# Altium PCB clock_control.PcbDoc
Units mm, origin at the board's own origin, x right, y up, seen from the top; angles counter-clockwise.
Board outline 100 x 61.5 mm, 2 copper layers (Top Layer, Bottom Layer); 48 components, 75 nets, 292 pads, 42 vias.
Unrouted connection lines stored in the file: 25.
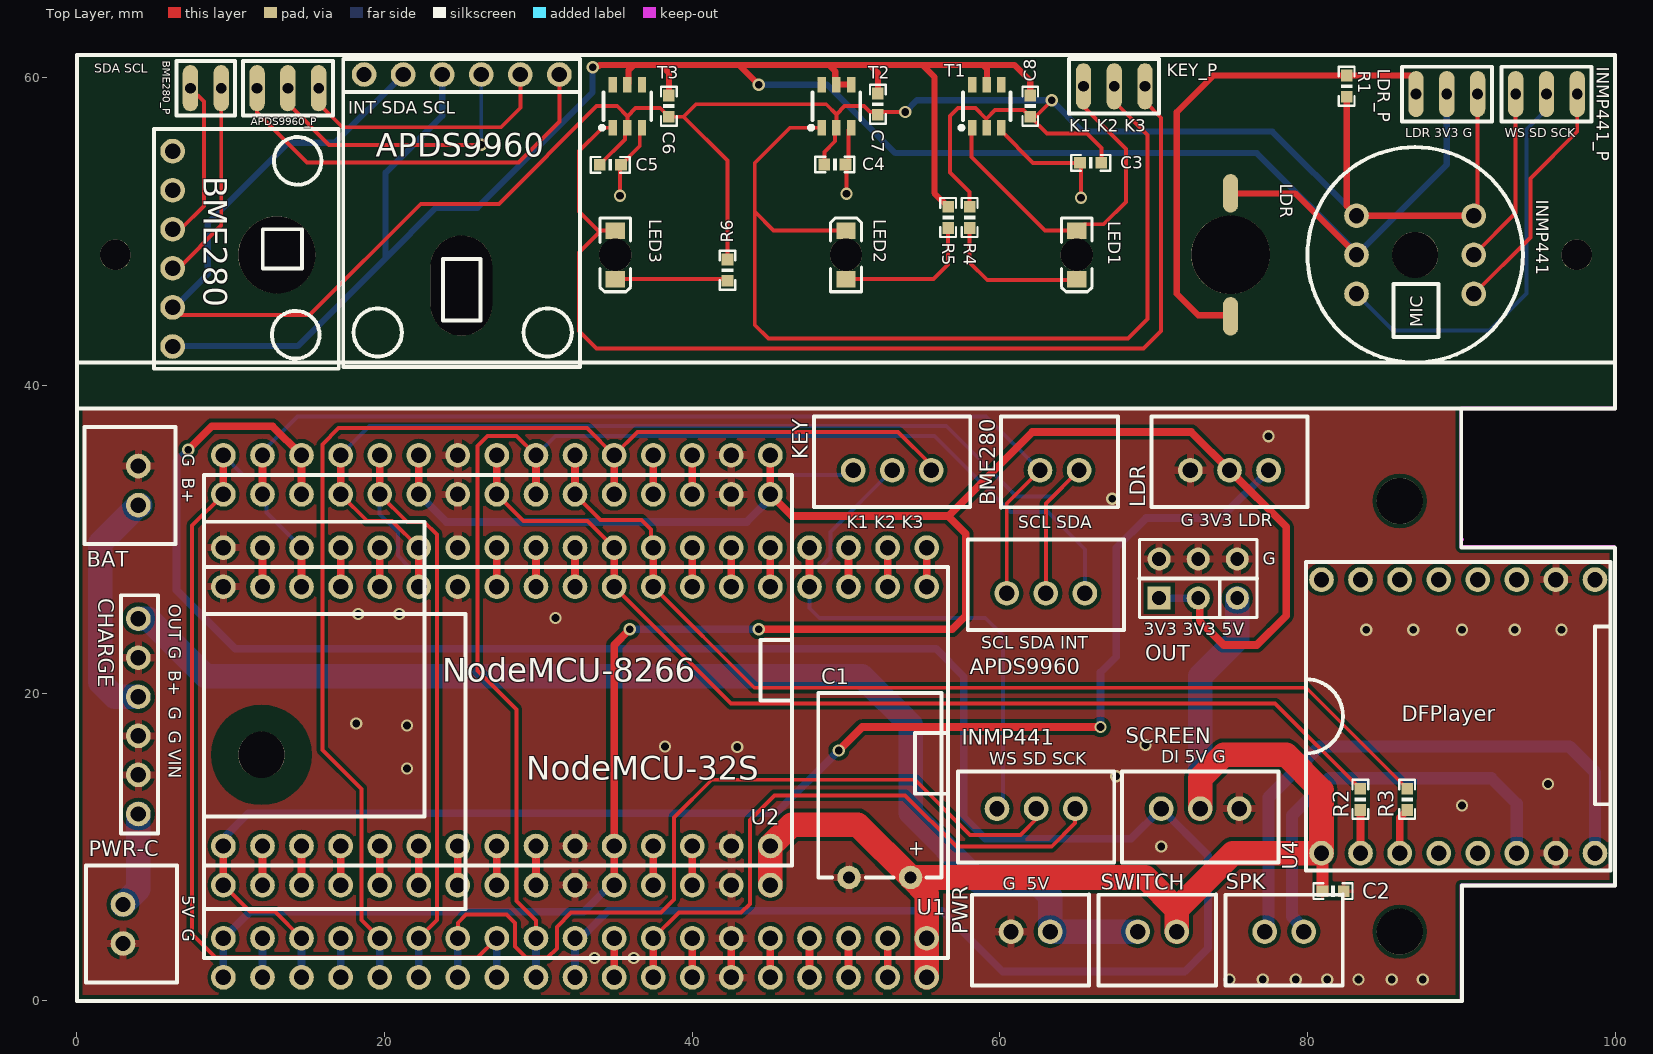
[diagram p0: Top Layer view]
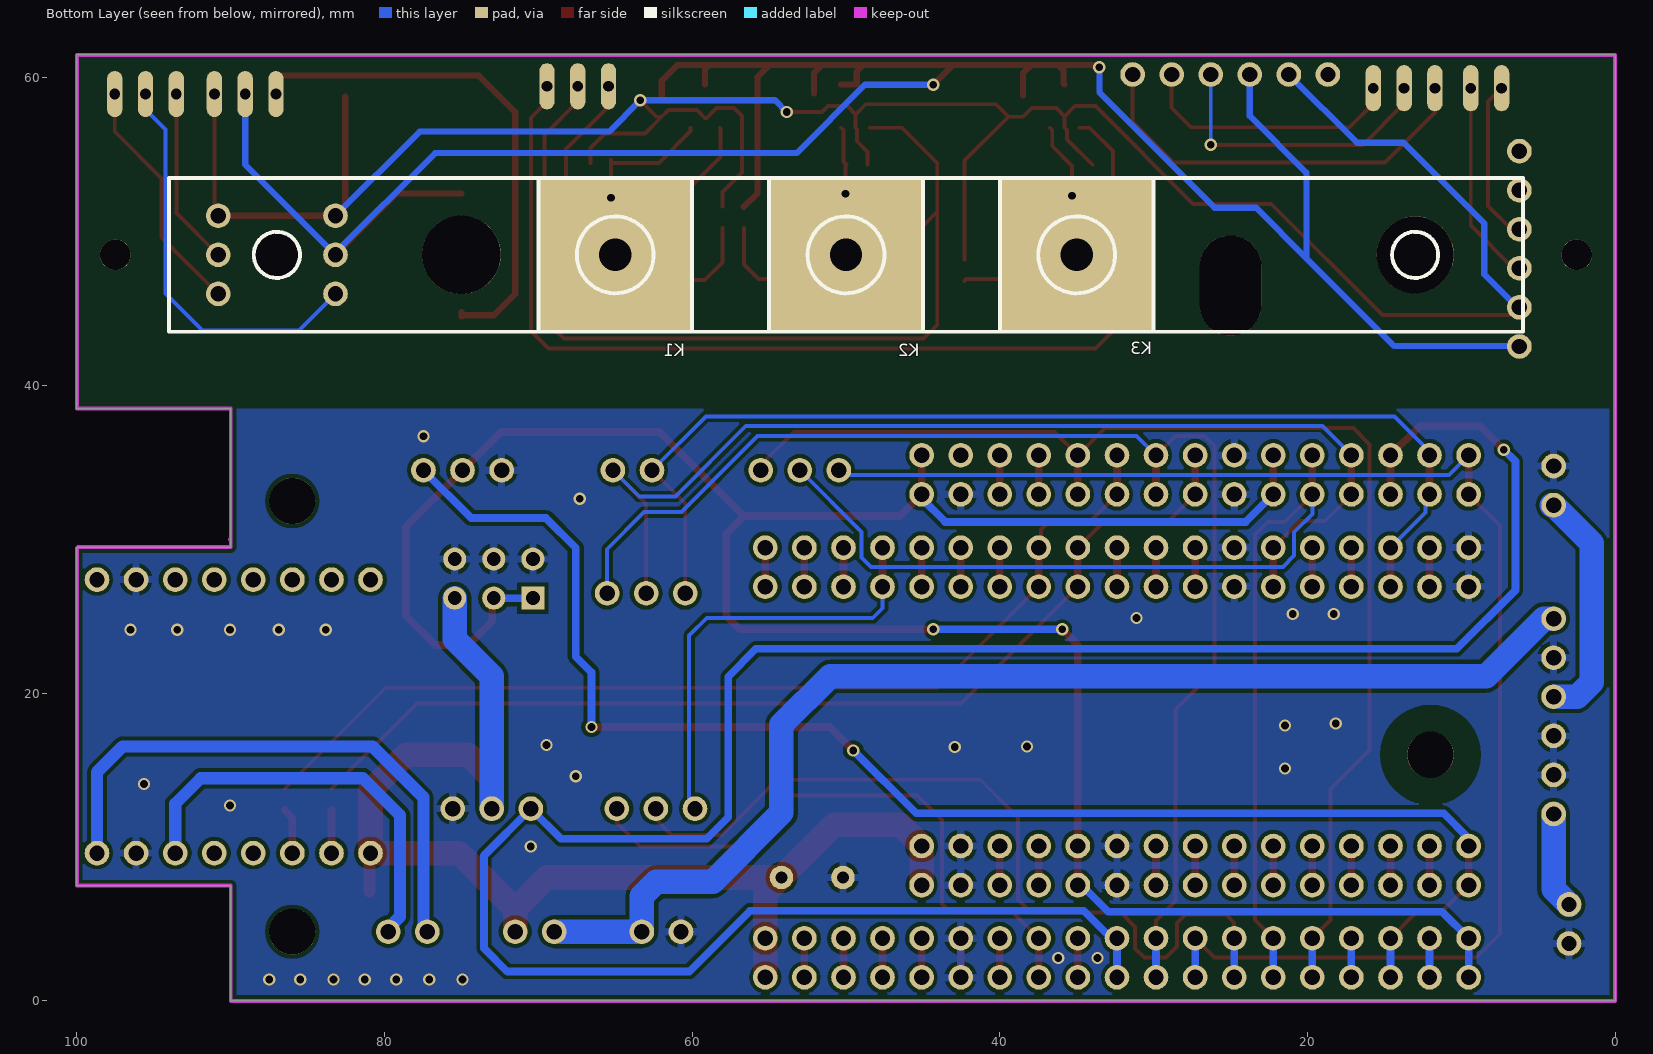
[diagram p1: Bottom Layer view, seen from below]

## Layer stack, top to bottom
Top Solder: solder mask 0.0102, Solder Resist, Dk 3.5
Top Layer: signal copper 0.0356
Dielectric 1: dielectric 0.32, FR-4, Dk 4.8
Bottom Layer: signal copper 0.0356
Bottom Solder: solder mask 0.0102, Solder Resist, Dk 3.5

## Board outline
0,0 0,61.492 0,61.5 100,61.5 100,38.5 90,38.5 90,29.5 99.937,29.5 100,29.437 100,7.5 90,7.5 90,0

## Design rules (kind name [scope] priority, off if disabled: settings)
Clearance [All] p1: gap=0.254 ignorepadtopadclearanceinfootprint=FALSE except(0: Arc-Hole Track-Hole SMDPad-Hole THPad-Hole Via-Hole Fill-Hole Poly-Hole Region-Hole Text-Hole)
ComponentClearance [All] p1 off: gap=0.254 collisioncheckmode=3 verticalgap=0.254 showdistances=FALSE
PolygonConnect [All] p1: thpad.connectstyle=Relief thpad.reliefconductorwidth=0.5 thpad.reliefentries=4 thpad.polygonreliefangle="90 Angle" thpad.airgapwidth=0.254 smdpad.connectstyle=Relief smdpad.reliefconductorwidth=0.254 smdpad.reliefentries=4 smdpad.polygonreliefangle="90 Angle" smdpad.airgapwidth=0.254 via.connectstyle=Direct via.reliefconductorwidth=0.254 via.reliefentries=4 via.polygonreliefangle="90 Angle" via.airgapwidth=0.254
RoutingVias [All] p1: holewidth=0.711 width=1.27 viastyle="Through Hole" minholewidth=0.711 minwidth=1.27 maxholewidth=0.711 maxwidth=1.27
SolderMaskExpansion [All] p1: expansion=0.102
Width [All] p1: maxlimit=2 minlimit=0.1 preferedwidth=1.6
29 further rules are at their usual default settings.

## Classes and differential pairs
component class clock_control_touchpad: APDS9960 APDS9960_P BME280 BME280_P C3 C4 C5 C6 C7 C8 INMP441 INMP441_P K1 K2 k3 KEY_P LDR LDR_P LED1 LED2 LED3 R1 R4 R5 R6 T1 T2 T3
component class clock_control: APDS9960 BAT BME280 C1 C2 CHARGE INMP441 KEY LDR OUT PWR PWR-C R2 R3 SCREEN SPK SWITCH U1 U2 U4

## Components (designator, comment, footprint, x,y, rotation, side; value= is the part's Value field where it differs from the comment)
APDS9960 "APDS9960" HEADER3-P 62.992,26.5 r90 top
APDS9960 "APDS9960" APDS-9960 25.019,60.222 r90 top
APDS9960_P "header" HEADER3-2.0 13.716,59.333 r270 top
BAT "BAT" HEADER2-P 4,33.5 r180 top
BME280 "BME280" HEADER2-P 63.881,34.5 r90 top
BME280 "BME280" BME280 6.223,48.895 r180 top
BME280_P "HEADER2" HEADER2-2.0 8.382,59.333 r270 top
C1 "1000uF" C0812 52.197,8.025 r90 top
C2 "104" 0603P 81.661,7.136 r0 top
C3 "10pF" 0603P 65.913,54.483 r180 top
C4 "10pF" 0603P 49.276,54.38 r0 top
C5 "10pF" 0603P 34.671,54.356 r0 top
C6 "104" 0603P 38.481,58.166 r90 top
C7 "104" 0603P 52.07,58.293 r90 top
C8 "104" 0603P 61.976,58.166 r90 top
CHARGE "CHARGE" CHARGE 4,18.5 r180 top
INMP441 "INMP441" HEADER3-P 62.357,12.5 r270 top
INMP441 "INMP441" INMP441 87,48.5 r0 top
INMP441_P "header" HEADER3-2.0 95.536,58.952 r270 top
K1 "KEY" TOUCH-PAD 65,48.5 r0 top
K2 "KEY" TOUCH-PAD 50,48.5 r0 top
K3 "KEY" TOUCH-PAD 35,48.5 r0 top
KEY "KEY" HEADER3-P 53,34.5 r90 top
KEY_P "header" HEADER3-2.0 67.437,59.46 r90 top
LDR "LDR" HEADER3-P 74.93,34.5 r90 top
LDR "LDR" LDR 75,48.5 r90 top
LDR_P "header" HEADER3-2.0 89.059,58.952 r270 top
LED1 "LED1" LED 65,48.5 r90 top
LED2 "LED2" LED 50,48.5 r270 top
LED3 "LED3" LED 35,48.5 r90 top
OUT "OUT" HDR2X3 70.358,26.186 r0 top
PWR "PWR" HEADER2-P 62,4.5 r270 top
PWR-C "PWR-C" HEADER2-P 3,5 r0 top
R1 "1K" 0603P 82.55,59.46 r90 top
R2 "1K" 0603P 83.439,13.105 r270 top
R3 "1K" 0603P 86.487,13.105 r270 top
R4 "1K" 0603P 58.039,50.927 r90 top
R5 "1K" 0603P 56.642,50.927 r90 top
R6 "1K" 0603P 42.291,47.498 r90 top
SCREEN "SCREEN" HEADER3-P 73.025,12.5 r270 top
SPK "SPK" HEADER2-P 78.486,4.5 r270 top
SWITCH "SWITCH" HEADER2-P 70.231,4.5 r270 top
T1 "TTP223B" TTP223B 59.055,58.166 r90 top
T2 "TTP223B" TTP223B 49.276,58.166 r90 top
T3 "TTP223B" TTP223B 35.687,58.166 r90 top
U1 "NODEMCU-32S" NODEMCU-32S-2P 32.385,15.5 r90 top
U2 "NODEMCU-8266" NODEMCU-8266-2P 32.385,21.5 r90 top
U4 "DFPlayer" DFPlayer 89.8,18.5 r90 top

## Footprints (in the part's own frame and the unit in brackets; to place one, negate y for a bottom-side part, rotate by r counter-clockwise, add the part's x,y. Pads: shape width x height; smd on the part's side, far side on the other; paste and mask are expansions set on the pad)
0603P [mil]
  rect 30x30 smd: 1(-27,0) 2(27.5,-0.06)
  silkscreen extent -50,-20 50,20
APDS-9960 [mm]
  round 1.6 hole 1: 1(0,6.35) 2(0,3.81) 3(0,1.27) 4(0,-1.27) 5(0,-3.81) 6(0,-6.35)
  silkscreen extent -19,-7.7 1,7.7
BME280 [mm]
  round 1.6 hole 1: 1(0,6.35) 2(0,3.81) 3(0,1.27) 4(0,-1.27) 5(0,-3.81) 6(0,-6.35)
  silkscreen extent -10.8,-7.8 1.2,7.8
C0812 [mil] "C0812"
  round 60 hole 30: 1(0,-78.74) 2(0,78.74)
  silkscreen extent 0,-157 472,157
CHARGE [mm]
  round 1.6 hole 1: 1(0,6.35) 2(0,3.81) 3(0,1.27) 4(0,-1.27) 5(0,-3.81) 6(0,-6.35)
  silkscreen extent -1.27,-7.87 1.14,7.62
DFPlayer [mm]
  round 1.6 hole 1: 1(-8.89,8.89) 2(-8.89,6.35) 3(-8.89,3.81) 4(-8.89,1.27) 5(-8.89,-1.27) 6(-8.89,-3.81) 7(-8.89,-6.35) 8(-8.89,-8.89) 9(8.89,-8.89) 10(8.89,-6.35) 11(8.89,-3.81) 12(8.89,-1.27) 13(8.89,1.27) 14(8.89,3.81) 15(8.89,6.35) 16(8.89,8.89)
  silkscreen extent -10.03,-9.91 10.03,9.91
HDR2X3 [mm]
  rect 1.5x1.5 hole 0.9: 1(0,0)
  round 1.5 hole 0.9: 2(0,2.54) 3(2.54,0) 4(2.54,2.54) 5(5.08,0) 6(5.08,2.54)
  silkscreen extent -1.27,-1.27 6.35,3.81
HEADER2-2.0 [mm]
  oval 3x1 hole 0.7: 1(0,1) 2(0,-1)
  silkscreen extent -1.78,-1.91 1.78,1.91
HEADER2-P [mm]
  round 1.6 hole 1: 1(0,1.27) 2(0,-1.27)
  silkscreen extent -2.42,-3.81 3.5,3.81
HEADER3-2.0 [mm]
  oval 3x1 hole 0.7: 1(0,2) 2(0,0) 3(0,-2)
  silkscreen extent -1.78,-2.92 1.78,2.94
HEADER3-P [mm]
  round 1.6 hole 1: 1(0,2.54) 2(0,0) 3(0,-2.54)
  silkscreen extent -2.4,-5.08 3.5,5.08
INMP441 [mm]
  round 3 hole 3: 0(0,0)
  round 1.6 hole 1: 1(-3.81,2.54) 2(-3.81,0) 3(-3.81,-2.54) 4(3.81,-2.54) 5(3.81,0) 6(3.81,2.54)
  silkscreen extent -7,-7 7,7
LDR [mm]
  round 5.1 hole 5.1: 0(0,0)
  oval 2.5x1 smd: 1(-4,0) 2(4,0)
LED [mm]
  rect 1.07x1.25 smd: 1(1.58,0) 2(-1.58,0)
  round 2.1 hole 2.1 unplated: ""(0,0)
  silkscreen extent -2.4,-1 2.4,1
NODEMCU-32S-2P [mm]
  round 1.6 hole 1: 1(-13.97,22.86) 1(-11.43,22.86) 2(-13.97,20.32) 2(-11.43,20.32) 3(-13.97,17.78) 3(-11.43,17.78) 4(-13.97,15.24) 4(-11.43,15.24) 5(-13.97,12.7) 5(-11.43,12.7) 6(-13.97,10.16) 6(-11.43,10.16) 7(-13.97,7.62) 7(-11.43,7.62) 8(-13.97,5.08) 8(-11.43,5.08) 9(-13.97,2.54) 9(-11.43,2.54) 10(-13.97,0) 10(-11.43,0) 11(-13.97,-2.54) 11(-11.43,-2.54) 12(-13.97,-5.08) 12(-11.43,-5.08) 13(-13.97,-7.62) 13(-11.43,-7.62) 14(-13.97,-10.16) 14(-11.43,-10.16) 15(-13.97,-12.7) 15(-11.43,-12.7) 16(-13.97,-15.24) 16(-11.43,-15.24) 17(-13.97,-17.78) 17(-11.43,-17.78) 18(-13.97,-20.32) 18(-11.43,-20.32) 19(-13.97,-22.86) 19(-11.43,-22.86) 20(11.43,-22.86) 20(13.97,-22.86) 21(11.43,-20.32) 21(13.97,-20.32) 22(11.43,-17.78) 22(13.97,-17.78) 23(11.43,-15.24) 23(13.97,-15.24) 24(11.43,-12.7) 24(13.97,-12.7) 25(11.43,-10.16) 25(13.97,-10.16) 26(11.43,-7.62) 26(13.97,-7.62) 27(11.43,-5.08) 27(13.97,-5.08) 28(11.43,-2.54) 28(13.97,-2.54) 29(11.43,0) 29(13.97,0) 30(11.43,2.54) 30(13.97,2.54) 31(11.43,5.08) 31(13.97,5.08) 32(11.43,7.62) 32(13.97,7.62) 33(11.43,10.16) 33(13.97,10.16) 34(11.43,12.7) 34(13.97,12.7) 35(11.43,15.24) 35(13.97,15.24) 36(11.43,17.78) 36(13.97,17.78) 37(11.43,20.32) 37(13.97,20.32) 38(11.43,22.86) 38(13.97,22.86)
  silkscreen extent -12.7,-24.26 12.7,24.13
NODEMCU-8266-2P [mm]
  round 1.6 hole 1: 1(-13.97,22.86) 1(-11.43,22.86) 2(-13.97,20.32) 2(-11.43,20.32) 3(-13.97,17.78) 3(-11.43,17.78) 4(-13.97,15.24) 4(-11.43,15.24) 5(-13.97,12.7) 5(-11.43,12.7) 6(-13.97,10.16) 6(-11.43,10.16) 7(-13.97,7.62) 7(-11.43,7.62) 8(-13.97,5.08) 8(-11.43,5.08) 9(-13.97,2.54) 9(-11.43,2.54) 10(-13.97,0) 10(-11.43,0) 11(-13.97,-2.54) 11(-11.43,-2.54) 12(-13.97,-5.08) 12(-11.43,-5.08) 13(-13.97,-7.62) 13(-11.43,-7.62) 14(-13.97,-10.16) 14(-11.43,-10.16) 15(-13.97,-12.7) 15(-11.43,-12.7) 16(11.43,-12.7) 16(13.97,-12.7) 17(11.43,-10.16) 17(13.97,-10.16) 18(11.43,-7.62) 18(13.97,-7.62) 19(11.43,-5.08) 19(13.97,-5.08) 20(11.43,-2.54) 20(13.97,-2.54) 21(11.43,0) 21(13.97,0) 22(11.43,2.54) 22(13.97,2.54) 23(11.43,5.08) 23(13.97,5.08) 24(11.43,7.62) 24(13.97,7.62) 25(11.43,10.16) 25(13.97,10.16) 26(11.43,12.7) 26(13.97,12.7) 27(11.43,15.24) 27(13.97,15.24) 28(11.43,17.78) 28(13.97,17.78) 29(11.43,20.32) 29(13.97,20.32) 30(11.43,22.86) 30(13.97,22.86)
  silkscreen extent -12.7,-14.1 12.7,24.13
TOUCH-PAD [mm]
  rect 10x10 smd far side: 1(0,0)
TTP223B [mm]
  rect 1x0.55 smd: 1(-1.4,0.849) 2(-1.4,-0.101) 3(-1.4,-1.051) 4(1.4,-1.051) 5(1.4,-0.101) 6(1.4,0.849)
  silkscreen extent -1.52,-1.65 0.9,1.68

## Part data
APDS9960 APDS9960_P INMP441 INMP441_P KEY KEY_P LDR LDR_P SCREEN: library part HEADER3
BAT PWR PWR-C SWITCH: library part HEADER2-PWR
BME280 SPK: library part HEADER2
C1: library part CAP
C2 C3 C4 C5 C6 C7 C8: library part C
K1 K2 K3: library part TOUCH-PAD
LED1 LED3: library part LED2, "Typical RED, GREEN, YELLOW, AMBER GaAs LED", LatestRevisionDate=17-Jul-2002, LatestRevisionNote="Re-released for DXP Platform.", PackageDescription="SM LED; 2 Flat Leads", PackageReference=3.2X1.6X1.1, PackageVersion=Feb-2002, Published=8-Jun-2000, Publisher="Altium Limited"
LED2: "Typical RED, GREEN, YELLOW, AMBER GaAs LED", LatestRevisionDate=17-Jul-2002, LatestRevisionNote="Re-released for DXP Platform.", PackageDescription="SM LED; 2 Flat Leads", PackageReference=3.2X1.6X1.1, PackageVersion=Feb-2002, Published=8-Jun-2000, Publisher="Altium Limited"
OUT: library part "Header 3X2", "Header, 3-Pin, Dual row", LatestRevisionDate=17-Jul-2002, LatestRevisionNote="Re-released for DXP Platform.", Publisher="Altium Limited"
R1 R2 R3 R4 R5 R6: library part R

## Free pads (board coordinates)
  round 3 hole 3: 2(12,16) 2(86,4.5) 2(86,32.5)
  round 5 hole 5: 4(13,48.5)
  oval 4x6.5 hole 6.5 slot 4 at 0 deg: 5(25,46.5)
  round 2 hole 2: 6(2.5,48.5) 6(97.5,48.5)

## Via types
v1: diameter 0.8, hole 0.5, Top Layer to Bottom Layer, tented both sides, 42 vias

## Nets (pads, with @x,y where several pads share a name; then routed paths per layer and width w, separated by ;. In a path a pad name is that pad's centre, name@x,y a point inside that pad or via, vN(x,y) a via of type N, cw(c..) or ccw(c..) an arc to the next point about the centre after c; other vN are vias at no path point)
3V3: LDR.2@74.93,34.5 OUT.1 OUT.3 U1.1 U2.11 U2.16 U2.25 | length 161
  Top Layer w0.5: U2.25@22.225,32.93 U2.25@22.225,35.47 ; U2.11@34.925,7.53 34.925,10.07 34.925,23.138 v1(35.941,24.154) ; v1(44.323,24.154) 56.896,24.154 57.785,25.043 57.785,30.377 56.642,31.52 ; U2.16@45.085,35.47 45.085,32.93 46.495,31.52 56.642,31.52 ; OUT.3 73.001,26.083 73.001,24.686 74.549,23.138 76.708,23.138 78.613,25.043 78.613,30.817 74.93,34.5 72.449,36.981 62.103,36.981 56.642,31.52
  Bottom Layer w0.5: U1.1@9.525,1.53 9.525,4.07 11.255,5.8 32.954,5.8 34.684,7.53 U2.11@34.925,7.53 ; U2.25@22.225,32.93 24.016,31.139 43.561,31.139 45.085,32.663 U2.16@45.085,32.93 ; v1(35.941,24.154) v1(44.323,24.154) ; OUT.1 OUT.3
5V: C1.1 C2.1 OUT.5 SCREEN.2 SWITCH.1 U1.19 U2.15 U4.1 | length 83.8
  Top Layer w0.8: C2.1 U4.1@80.975,9.545
  Top Layer w1: U4.1 U4.1@80.975,9.545
  Top Layer w1.6: U2.15@45.085,7.53 45.085,10.07 46.469,11.454 50.768,11.454 C1.1 ; U1.19@55.245,1.53 55.245,4.07 55.245,6.977 C1.1 ; SWITCH.1 71.501,5.969 ; SCREEN.2 73.025,14.478 74.549,16.002 78.613,16.002 80.91,13.705 U4.1 75.142,9.61 71.501,5.969 ; C1.1 69.445,8.025 71.501,5.969
  Bottom Layer w1.6: SCREEN.2 73.025,21.106 75.438,23.519 OUT.5
5V_IN: CHARGE.6 PWR.1 SWITCH.2 | length 78.1
  Bottom Layer w1.6: CHARGE.6 4.638,24.85 8.382,21.106 51.03,21.106 54.197,17.939 54.197,12.224 58.674,7.747 62.333,7.747 63.27,6.81 PWR.1 SWITCH.2
DFRX: R2.1 U1.28 U2.23 | length 68.1
  Top Layer w0.254: U2.23@27.305,32.93 29.035,31.2 33.195,31.2 U1.28@34.925,29.47 ; U1.28@34.925,26.93 42.527,19.328 77.902,19.328 R2.1
  Top Layer w0.5: U2.23@27.305,32.93 U2.23@27.305,35.47 ; U1.28@34.925,26.93 U1.28@34.925,29.47
DFTX: R3.1 U1.27 U2.21 | length 66.7
  Top Layer w0.254: U2.21@32.385,32.93 34.049,31.266 36.703,31.266 37.318,30.651 37.318,29.617 U1.27@37.465,29.47 ; U1.27@37.465,26.93 44.036,20.359 79.919,20.359 R3.1
  Top Layer w0.5: U2.21@32.385,32.93 U2.21@32.385,35.47 ; U1.27@37.465,26.93 U1.27@37.465,29.47
DI: SCREEN.3 U1.10 U2.28 | length 154.7
  Top Layer w0.5: v1(7.239,35.838) 8.763,37.362 12.713,37.362 14.605,35.47 U2.28@14.605,32.93 ; U1.10@32.385,1.53 U1.10@32.403,1.53
  Bottom Layer w0.5: v1(7.239,35.838) 6.477,35.076 6.477,26.694 10.287,22.884 55.856,22.884 57.658,21.082 57.658,11.938 59.055,10.541 68.526,10.541 SCREEN.3 73.533,9.452 73.533,3.429 72.009,1.905 60.198,1.905 56.237,5.866 34.544,5.866 32.748,4.07 32.385,4.07 U1.10@32.385,1.53
GND: BAT.2 C1.2 C2.2 CHARGE.2 CHARGE.3 CHARGE.5 LDR.1@72.39,34.5 OUT.2 OUT.4 OUT.6 PWR-C.2 PWR.2 SCREEN.1 U1.14 U1.32 U1.38 U2.10 U2.14 U2.17 U2.24 U4.7 U4.10 | length 2.5
  Top Layer w0.5: U1.14@42.545,1.53 U1.14@42.545,4.07
  other v1: 74.93,1.397 77.089,1.397 79.248,1.397 81.28,1.397 83.312,1.397 85.471,1.397 87.503,1.397 33.655,2.794 36.195,2.794 70.485,10.033 90.043,12.7 95.631,14.097 67.564,14.605 21.463,15.113 42.926,16.51 38.227,16.534 69.469,16.637 21.463,17.907 18.161,18.034 83.82,24.13 86.868,24.13 90.043,24.13 93.472,24.13 96.52,24.13 31.115,24.892 18.288,25.146 20.955,25.146 67.31,32.639 77.47,36.703
GND_T: APDS9960.2@21.209,60.222 BME280.2@6.223,45.085 C3.1 C4.1 C5.1 C6.1 C7.1 C8.1 INMP441.1@83.19,51.04 INMP441.6 LDR_P.1 R1.1 R4.2 R6.2 T1.2 T2.2 T3.2 | length 174
  Top Layer w0.254: BME280.2@6.223,45.085 6.731,44.577 15.113,44.577 22.352,51.816 27.432,51.816 33.782,58.166 35.127,58.166 35.788,57.505 ; C5.1 35.64,56.011 35.64,56.618 T3.2 35.788,57.505 ; R6.2 42.293,54.634 39.446,57.48 ; C4.1 48.59,55.194 49.281,55.885 49.281,56.67 T2.2 49.377,57.632 ; v1(53.848,57.785) 51.562,57.785 51.181,58.166 49.911,58.166 49.377,57.632 ; R4.2 58.041,52.576 56.769,53.848 56.769,57.531 57.277,58.039 58.42,58.039 59.081,57.378 59.156,57.378 59.69,57.912 61.544,57.912 C8.1 ; v1(63.373,58.547) 62.306,57.48 C8.1 ; C3.1 66.599,55.448 65.659,56.388 63.068,56.388 C8.1 ; INMP441.6 91.059,51.289 LDR_P.1 ; 35.788,57.505 36.322,58.039 37.922,58.039 C6.1 39.446,57.48 ; 39.446,57.48 40.259,58.293 48.716,58.293 49.377,57.632
  Top Layer w0.4: R1.1 82.55,51.68 83.19,51.04 INMP441.6
  Bottom Layer w0.4: BME280.2@5.715,45.109 6.374,45.109 8.509,47.244 8.509,50.546 13.752,55.789 16.776,55.789 APDS9960.2@21.209,60.222 ; v1(53.848,57.785) 54.61,58.547 v1(63.373,58.547) 65.405,56.515 77.715,56.515 INMP441.1@83.19,51.04
INT: APDS9960.3@65.532,26.5 U1.9 U2.22 | length 85.4
  Top Layer w0.254: U1.9@29.845,4.07 29.845,5.231 28.575,6.501 28.575,18.947 26.035,21.487 26.035,36.07 26.692,36.727 28.588,36.727 U2.22@29.845,35.47
  Top Layer w0.5: U2.22@29.845,32.93 U2.22@29.845,35.47
  Bottom Layer w0.254: U2.22@29.845,35.47 31.102,36.727 55.753,36.727 60.706,31.774 63.119,31.774 65.532,29.361 APDS9960.3@65.532,26.5
  Bottom Layer w0.5: U1.9@29.845,1.53 U1.9@29.845,4.07
K1: KEY_P.1 LED1.1 T1.1 | length 23.4
  Top Layer w0.254: T1.1 58.166,56.726 58.166,54.864 62.95,50.08 LED1.1 65.09,50.08 65.498,50.488 66.744,50.488 68.199,51.943 68.199,55.372 65.405,58.166 65.405,59.428 KEY_P.1
K2: KEY_P.2 LED2.2 T2.1 | length 64.7
  Top Layer w0.254: T2.1 46.352,56.766 44.069,54.483 44.069,51.308 ; LED2.2 45.297,50.08 44.069,51.308 ; KEY_P.2 67.437,58.46 69.596,56.301 69.596,44.323 68.326,43.053 44.958,43.053 44.069,43.942 44.069,51.308
K3: KEY_P.3 LED3.1 T3.1 | length 71.9
  Top Layer w0.254: T3.1 34.16,56.766 32.639,55.245 32.639,51.308 33.867,50.08 34.078,50.08 ; LED3.1 34.078,50.08 ; KEY_P.3 69.437,58.46 70.485,57.412 70.485,43.561 69.342,42.418 33.782,42.418 32.639,43.561 32.639,48.641 34.078,50.08
KEY1: KEY.1 U1.8 U2.30 | length 97.1
  Top Layer w0.254: U2.30@9.525,32.93 7.493,30.898 7.493,4.342 9.017,2.818 26.053,2.818 U1.8@27.305,4.07
  Top Layer w0.5: U2.30@9.525,32.93 U2.30@9.525,35.47
  Bottom Layer w0.254: U2.30@9.525,35.47 10.808,34.187 50.147,34.187 KEY.1
  Bottom Layer w0.5: U1.8@27.305,1.53 U1.8@27.305,4.07
KEY2: KEY.2 U1.6 U2.26 | length 77.1
  Top Layer w0.254: U2.26@19.685,32.93 21.476,31.139 22.584,31.139 23.406,30.317 23.406,5.251 U1.6@22.225,4.07
  Top Layer w0.5: U2.26@19.685,32.93 U2.26@19.685,35.47
  Bottom Layer w0.254: U2.26@19.685,32.93 19.685,31.647 20.866,30.466 20.866,28.942 21.59,28.218 48.387,28.218 48.984,28.815 48.984,30.484 KEY.2
  Bottom Layer w0.5: U1.6@22.225,1.53 U1.6@22.225,4.07
KEY3: KEY.3 U1.5 U2.20 | length 81.3
  Top Layer w0.254: U1.5@19.685,4.07 18.504,5.251 18.504,13.778 15.964,16.318 15.964,36.181 17.018,37.235 33.16,37.235 34.925,35.47 36.436,36.981 53.393,36.981 55.54,34.834 KEY.3
  Top Layer w0.5: U2.20@34.925,32.93 U2.20@34.925,35.47
  Bottom Layer w0.5: U1.5@19.685,1.53 U1.5@19.685,4.07
LDRA: LDR.3 U1.3 U2.1 | length 96.2
  Top Layer w0.254: U2.1@9.525,7.53 11.255,5.8 12.875,5.8 U1.3@14.605,4.07
  Top Layer w0.5: U2.1@9.525,7.53 U2.1@9.525,10.07 ; v1(49.53,16.28) 51.054,17.804 v1(66.548,17.804)
  Bottom Layer w0.5: U2.1@9.525,10.07 9.564,10.109 9.564,10.604 11.152,12.192 45.442,12.192 v1(49.53,16.28) ; U1.3@14.605,1.53 U1.3@14.605,4.07 ; v1(66.548,17.804) 66.548,21.36 67.564,22.376 67.564,29.449 69.508,31.393 74.363,31.393 LDR.3
NetAPDS9960_4: APDS9960.4 APDS9960_P.2 | length 19.3
  Top Layer w0.254: APDS9960_P.2 13.716,58.333 16.399,55.65 v1(26.289,55.65)
  Bottom Layer w0.254: v1(26.289,55.65) APDS9960.4
NetAPDS9960_5: APDS9960.5 APDS9960_P.1 | length 17.4
  Top Layer w0.254: APDS9960_P.1 15.716,58.333 17.256,56.793 27.559,56.793 28.829,58.063 APDS9960.5
NetAPDS9960_6: APDS9960.6 APDS9960_P.3 | length 26.7
  Top Layer w0.254: APDS9960_P.3 11.716,57.753 14.962,54.507 28.702,54.507 31.369,57.174 APDS9960.6
NetBAT_1: BAT.1 CHARGE.4 | length 15.5
  Bottom Layer w1.6: CHARGE.4 2.461,19.77 1.524,20.707 1.524,29.754 BAT.1 BAT.1@4.116,32.23
NetBME280_3: BME280.3 BME280_P.1 | length 13.7
  Top Layer w0.254: BME280.3@5.715,47.649 6.628,47.649 9.382,50.403 BME280_P.1
NetBME280_4: BME280.4 BME280_P.2 | length 11.2
  Top Layer w0.254: BME280.4@5.715,50.189 6.755,50.189 8.255,51.689 8.255,58.46 BME280_P.2
NetC3_2: C3.2 K1.1 T1.3 | length 8.7
  Top Layer w0.254: T1.3 60.106,56.541 62.162,54.485 C3.2 C3.2@65.189,54.459 ; v1(65.278,52.221) C3.2@65.278,54.672
NetC4_2: C4.2 K2.1 T2.3 | length 4.5
  Top Layer w0.254: v1(50.038,52.475) 50.038,54.315 C4.2 50.165,54.569 50.165,56.604 T2.3
NetC5_2: C5.2 K3.1 T3.3 | length 5
  Top Layer w0.254: v1(35.306,52.348) 35.306,54.291 C5.2 36.59,55.575 36.59,56.618 T3.3
NetCHARGE_1: CHARGE.1 PWR-C.1 | length 6.3
  Bottom Layer w1.6: PWR-C.1 4,7.27 CHARGE.1
NetINMP441_3: INMP441.3@83.19,45.96 INMP441_P.2 | length 26.5
  Bottom Layer w0.254: INMP441.3@83.19,45.96 85.565,43.585 91.821,43.585 94.234,45.998 94.234,56.65 95.536,57.952 INMP441_P.2
NetINMP441_4: INMP441.4 INMP441_P.1 | length 15.8
  Top Layer w0.254: INMP441.4 94.488,49.638 94.488,53.467 97.536,56.515 INMP441_P.1
NetINMP441_5: INMP441.5 INMP441_P.3 | length 11.6
  Top Layer w0.254: INMP441.5 93.536,51.226 INMP441_P.3
NetLabel17: U2.19 | length 2.5
  Top Layer w0.5: U2.19@37.465,32.93 U2.19@37.465,35.47
NetLabel18: U2.18 | length 2.5
  Top Layer w0.5: U2.18@40.005,32.93 U2.18@40.005,35.47
NetLabel19: U2.2 | length 2.5
  Top Layer w0.5: U2.2@12.065,7.53 U2.2@12.065,10.07
NetLabel20: U2.3 | length 2.5
  Top Layer w0.5: U2.3@14.605,7.53 U2.3@14.605,10.07
NetLabel21: U2.4 | length 2.5
  Top Layer w0.5: U2.4@17.145,7.53 U2.4@17.145,10.07
NetLabel22: U2.5 | length 2.5
  Top Layer w0.5: U2.5@19.685,7.53 U2.5@19.685,10.07
NetLabel23: U2.6 | length 2.5
  Top Layer w0.5: U2.6@22.225,7.53 U2.6@22.225,10.07
NetLabel24: U2.7 | length 2.5
  Top Layer w0.5: U2.7@24.765,7.53 U2.7@24.765,10.07
NetLabel25: U2.8 | length 2.5
  Top Layer w0.5: U2.8@27.305,7.53 U2.8@27.305,10.07
NetLabel26: U2.9 | length 2.5
  Top Layer w0.5: U2.9@29.845,7.53 U2.9@29.845,10.07
NetLabel27: U2.12 | length 2.5
  Top Layer w0.5: U2.12@37.465,7.53 U2.12@37.465,10.07
NetLabel28: U2.13 | length 2.5
  Top Layer w0.5: U2.13@40.005,7.53 U2.13@40.005,10.07
NetLabel29: U1.37 | length 2.5
  Top Layer w0.5: U1.37@12.065,26.93 U1.37@12.065,29.47
NetLabel30: U1.35 | length 2.5
  Top Layer w0.5: U1.35@17.145,26.93 U1.35@17.145,29.47
NetLabel31: U1.34 | length 2.5
  Top Layer w0.5: U1.34@19.685,26.93 U1.34@19.685,29.47
NetLabel32: U1.31 | length 2.5
  Top Layer w0.5: U1.31@27.305,26.93 U1.31@27.305,29.47
NetLabel33: U1.30 | length 2.5
  Top Layer w0.5: U1.30@29.845,26.93 U1.30@29.845,29.47
NetLabel34: U1.29 | length 2.5
  Top Layer w0.5: U1.29@32.385,26.93 U1.29@32.385,29.47
NetLabel35: U1.26 | length 2.5
  Top Layer w0.5: U1.26@40.005,26.93 U1.26@40.005,29.47
NetLabel36: U1.25 | length 2.5
  Top Layer w0.5: U1.25@42.545,26.93 U1.25@42.545,29.47
NetLabel37: U1.24 | length 2.5
  Top Layer w0.5: U1.24@45.085,26.93 U1.24@45.085,29.47
NetLabel38: U1.22 | length 2.5
  Top Layer w0.5: U1.22@50.165,26.93 U1.22@50.165,29.47
NetLabel39: U1.21 | length 2.5
  Top Layer w0.5: U1.21@52.705,26.93 U1.21@52.705,29.47
NetLabel40: U1.20 | length 2.5
  Top Layer w0.5: U1.20@55.245,26.93 U1.20@55.245,29.47
NetLabel41: U1.18 | length 2.5
  Top Layer w0.5: U1.18@52.705,1.53 U1.18@52.705,4.07
NetLabel42: U1.17 | length 2.5
  Top Layer w0.5: U1.17@50.165,1.53 U1.17@50.165,4.07
NetLabel43: U1.16 | length 2.5
  Top Layer w0.5: U1.16@47.625,1.53 U1.16@47.625,4.07
NetLabel44: U1.15 | length 2.5
  Top Layer w0.5: U1.15@45.085,1.53 U1.15@45.085,4.07
NetLabel45: U1.13 | length 2.5
  Top Layer w0.5: U1.13@40.005,1.53 U1.13@40.005,4.07
NetLabel46: U1.11 | length 2.5
  Top Layer w0.5: U1.11@34.925,1.53 U1.11@34.925,4.07
NetLabel47: U1.4 | length 2.5
  Bottom Layer w0.5: U1.4@17.145,1.53 U1.4@17.145,4.07
NetLabel48: U1.2 | length 2.5
  Bottom Layer w0.5: U1.2@12.065,1.53 U1.2@12.065,4.07
NetLDR_1: LDR.1@75,44.5 LDR_P.3 R1.2 | length 33.8
  Top Layer w0.4: LDR.1@75,44.5 75,44.773 74.804,44.577 72.898,44.577 71.501,45.974 71.501,57.785 73.875,60.159 R1.2 86.69,60.159 87.059,59.79 LDR_P.3
NetLED1_2: LED1.2 R4.1 | length 9.7
  Top Layer w0.254: R4.1 58.039,48.006 59.182,46.863 64.943,46.863 LED1.2
NetLED2_1: LED2.1 R5.1 | length 9.4
  Top Layer w0.254: LED2.1 55.683,46.92 56.642,47.879 R5.1
NetLED3_2: LED3.2 R6.1 | length 7.3
  Top Layer w0.254: LED3.2 42.183,46.92 R6.1
NetR2_2: R2.2 U4.2 | length 2.8
  Top Layer w0.5: R2.2 83.444,12.4 83.444,9.616 U4.2
NetR3_2: R3.2 U4.3 | length 3
  Top Layer w0.5: U4.3 85.99,11.911 R3.2
NetSPK_1: SPK.1 U4.6 | length 27.4
  Bottom Layer w0.8: SPK.1 79.756,4.716 78.994,5.478 78.994,12.065 81.407,14.478 91.948,14.478 93.61,12.816 U4.6
NetSPK_2: SPK.2 U4.8 | length 37.4
  Bottom Layer w0.8: SPK.2 77.47,4.754 77.47,13.232 80.772,16.534 97.028,16.534 98.69,14.872 U4.8
SCK: INMP441.1@64.897,12.5 U1.12 | length 40.1
  Top Layer w0.254: U1.12@37.465,4.07 39.134,5.739 43.18,5.739 43.752,6.311 43.752,11.772 45.339,13.359 53.848,13.359 57.174,10.033 63.373,10.033 64.897,11.557 64.897,12.119 INMP441.1@65.278,12.5
  Top Layer w0.5: U1.12@37.465,1.53 U1.12@37.465,4.07
SCL: APDS9960.1@60.452,26.5 BME280.1@62.611,34.5 U1.36 U2.29 | length 72
  Top Layer w0.254: U1.36@14.347,29.728 U1.36@14.605,29.47 ; APDS9960.1@60.452,26.5 60.452,32.341 BME280.1@62.611,34.5
  Top Layer w0.5: U2.29@12.065,32.93 U2.29@12.065,35.47 ; U1.36@14.605,26.93 U1.36@14.605,29.47
  Bottom Layer w0.254: U2.29@12.065,32.93 12.323,32.672 12.323,31.752 U1.36@14.605,29.47 ; U2.29@12.065,35.47 12.065,35.711 14.351,37.997 59.114,37.997 BME280.1@62.611,34.5
SD: INMP441.2@62.357,12.5 U1.7 | length 54.9
  Top Layer w0.254: U1.7@24.765,4.07 24.765,5.08 25.297,5.612 27.94,5.612 28.486,5.066 28.486,3.542 29.21,2.818 30.607,2.818 31.204,3.415 31.204,4.812 32.131,5.739 37.973,5.739 38.824,6.59 38.824,11.924 41.275,14.375 54.483,14.375 58.063,10.795 61.341,10.795 62.484,11.938 62.484,12.23 62.738,12.484 INMP441.2@62.738,12.5
  Bottom Layer w0.5: U1.7@24.765,1.53 U1.7@24.765,4.07
SDA: APDS9960.2@62.992,26.5 BME280.2@65.151,34.5 U1.33 U2.27 | length 71.9
  Top Layer w0.254: U2.27@17.145,32.93 18.875,31.2 20.495,31.2 U1.33@22.225,29.47 ; APDS9960.2@62.992,26.5 62.992,32.341 BME280.2@65.151,34.5
  Top Layer w0.5: U2.27@17.145,32.93 U2.27@17.145,35.47 ; U1.33@22.225,26.93 U1.33@22.225,29.47
  Bottom Layer w0.254: U2.27@17.145,35.47 17.145,35.486 19.021,37.362 56.515,37.362 61.087,32.79 63.441,32.79 BME280.2@65.151,34.5
VCC_T: APDS9960.3@23.749,60.222 BME280.1@6.223,42.545 C6.2 C7.2 C8.2 INMP441.2@83.19,48.5 LDR.2@75,52.5 LDR_P.2 R5.2 T1.5 T2.4 T2.5 T3.5 | length 167.8
  Top Layer w0.4: BME280.1@5.715,42.569 BME280.1@6.242,42.042 ; v1(33.528,60.706) 33.605,60.783 33.945,60.783 33.995,60.833 36.195,60.833 ; T3.5 35.863,59.641 35.863,60.501 36.195,60.833 ; C6.2 38.483,60.323 37.973,60.833 ; v1(44.323,59.563) 43.053,60.833 ; T2.4 T2.5 49.302,59.641 49.302,60.426 48.895,60.833 ; C7.2 52.072,60.323 51.562,60.833 ; R5.2 55.753,52.516 55.753,60.071 54.991,60.833 ; T1.5 59.156,60.599 58.922,60.833 ; C8.2 61.978,59.815 60.96,60.833 58.922,60.833 ; LDR.2@75,52.5 79.19,52.5 INMP441.2@83.19,48.5 ; 36.195,60.833 37.973,60.833 ; 37.973,60.833 43.053,60.833 ; 43.053,60.833 48.895,60.833 ; 48.895,60.833 51.562,60.833 ; 51.562,60.833 54.991,60.833 ; 54.991,60.833 58.922,60.833
  Bottom Layer w0.4: BME280.1@5.715,42.569 14.351,42.569 20.066,48.284 ; APDS9960.3@23.749,60.222 23.749,57.531 20.066,53.848 20.066,48.284 ; v1(33.528,60.706) 33.528,59.055 26.035,51.562 23.344,51.562 20.066,48.284 ; v1(44.323,59.563) 48.768,59.563 53.213,55.118 76.708,55.118 83.19,48.636 83.19,48.5 89.059,54.369 LDR_P.2
WS: INMP441.3@59.817,12.5 U1.23 | length 28.5
  Top Layer w0.5: U1.23@47.625,26.93 U1.23@47.625,29.47
  Bottom Layer w0.254: U1.23@47.625,26.93 47.625,25.527 48.26,24.892 59.055,24.892 60.198,23.749 INMP441.3@60.198,12.5
pads on no net: APDS9960.1@18.669,60.222 BME280.5 BME280.6 INMP441.0 LDR.0 LED1. LED2. LED3. T1.4 T1.6 T2.6 T3.4 T3.6 U4.4 U4.5 U4.9 U4.11 U4.12 U4.13 U4.14 U4.15 U4.16

## Polygon pours and split planes (outlines as drawn)
GND on Bottom Layer "Bottom Layer-GND" (solid, remove dead copper, pour order 14): 0,38.481 89.981,38.481 90,38.5 90,29.5 99.937,29.5 100,29.437 100,7.5 90,7.5 90,0 0,0
GND on Top Layer "Top Layer-GND" (solid, remove dead copper, pour order 12): 0,0 0,38.481 89.981,38.481 90,38.5 90,29.5 99.937,29.5 100,29.437 100,7.5 90,7.5 90,0

## Keep-outs
Keep-Out Layer:
  lines w0.254: 0,61.492 0,0 90,0 90,7.5 100,7.5 100,29.437 99.937,29.5 90,29.5 90,38.5 100,38.5 100,61.492 ; 0,61.5 100,61.5 ; 90,30.039 90.043,29.996

## Silkscreen, mask and mechanical layers (free items; w line width, h text height)
Top Overlay:
  lines w0.254: 0,41.5 11.049,41.5 99.949,41.5 ; 69.088,27.456 76.708,27.456 ; 74.295,25.043 74.295,27.456 ; 0,38.5 0,0 90.043,0 90.043,7.5 100,7.5 ; 0,38.5 90,38.5 ; 0,38.5 0,61.5 100,61.5 100,38.5 90,38.5 ; 90,38.5 90,29.488 99.949,29.488 100,29.437 100,7.5 ; 100,7.5 100,7.5
  text "SDA SCL" at 1.143,60.325 h0.6
  text "INT SDA SCL" at 17.653,57.682 h0.8
  text "K1 K2 K3" at 64.516,56.515 h0.8
  text "LDR 3V3 G" at 86.36,56.134 h0.6
  text "WS SD SCK" at 92.837,56.134 h0.6
  text "G  B+" at 6.858,35.56 h0.8 r270
  text "G 3V3 LDR" at 71.755,30.861 h0.8
  text "K1 K2 K3" at 50.038,30.734 h0.8
  text "SCL SDA" at 61.214,30.734 h0.8
  text "G" at 77.089,28.345 h0.8
  text "OUT G  B+  G  G VIN" at 5.969,25.781 h0.8 r270
  text "3V3 3V3 5V" at 69.342,23.773 h0.8
  text "SCL SDA INT" at 58.801,22.884 h0.8
  text "DI 5V G" at 70.485,15.494 h0.8
  text "WS SD SCK" at 59.309,15.367 h0.8
  text "G  5V" at 60.198,7.239 h0.8
  text "5V  G" at 6.858,6.858 h0.8 r270
Bottom Overlay:
  circle w0.254: c87,48.5 r1.5
  circle w0.254: c13,48.5 r1.5
  circle w0.254: c35,48.5 r2.5
  circle w0.254: c50,48.5 r2.5
  circle w0.254: c65,48.5 r2.5
  lines w0.254: 30,43.5 30,53.5 ; 40,43.5 40,53.5 ; 45,43.5 45,53.5 ; 55,43.5 55,53.5 ; 60,43.5 60,53.5 ; 70,43.5 70,53.5 ; 6,43.5 6,53.5 94,53.5 94,43.5 6,43.5

## Text inside footprints (layer, text, board x,y; h text height)
C1: Top Overlay "+" at 54.991,9.295 h1 r90
INMP441: Top Overlay "MIC" at 87.508,43.801 h0.8 r90
U1: Top Overlay "NodeMCU-32S" at 29.21,14.375 h1.54
U2: Top Overlay "NodeMCU-8266" at 23.749,20.738 h1.54